# EAGLE board PCB schematic (EAGLE 9.6.2)
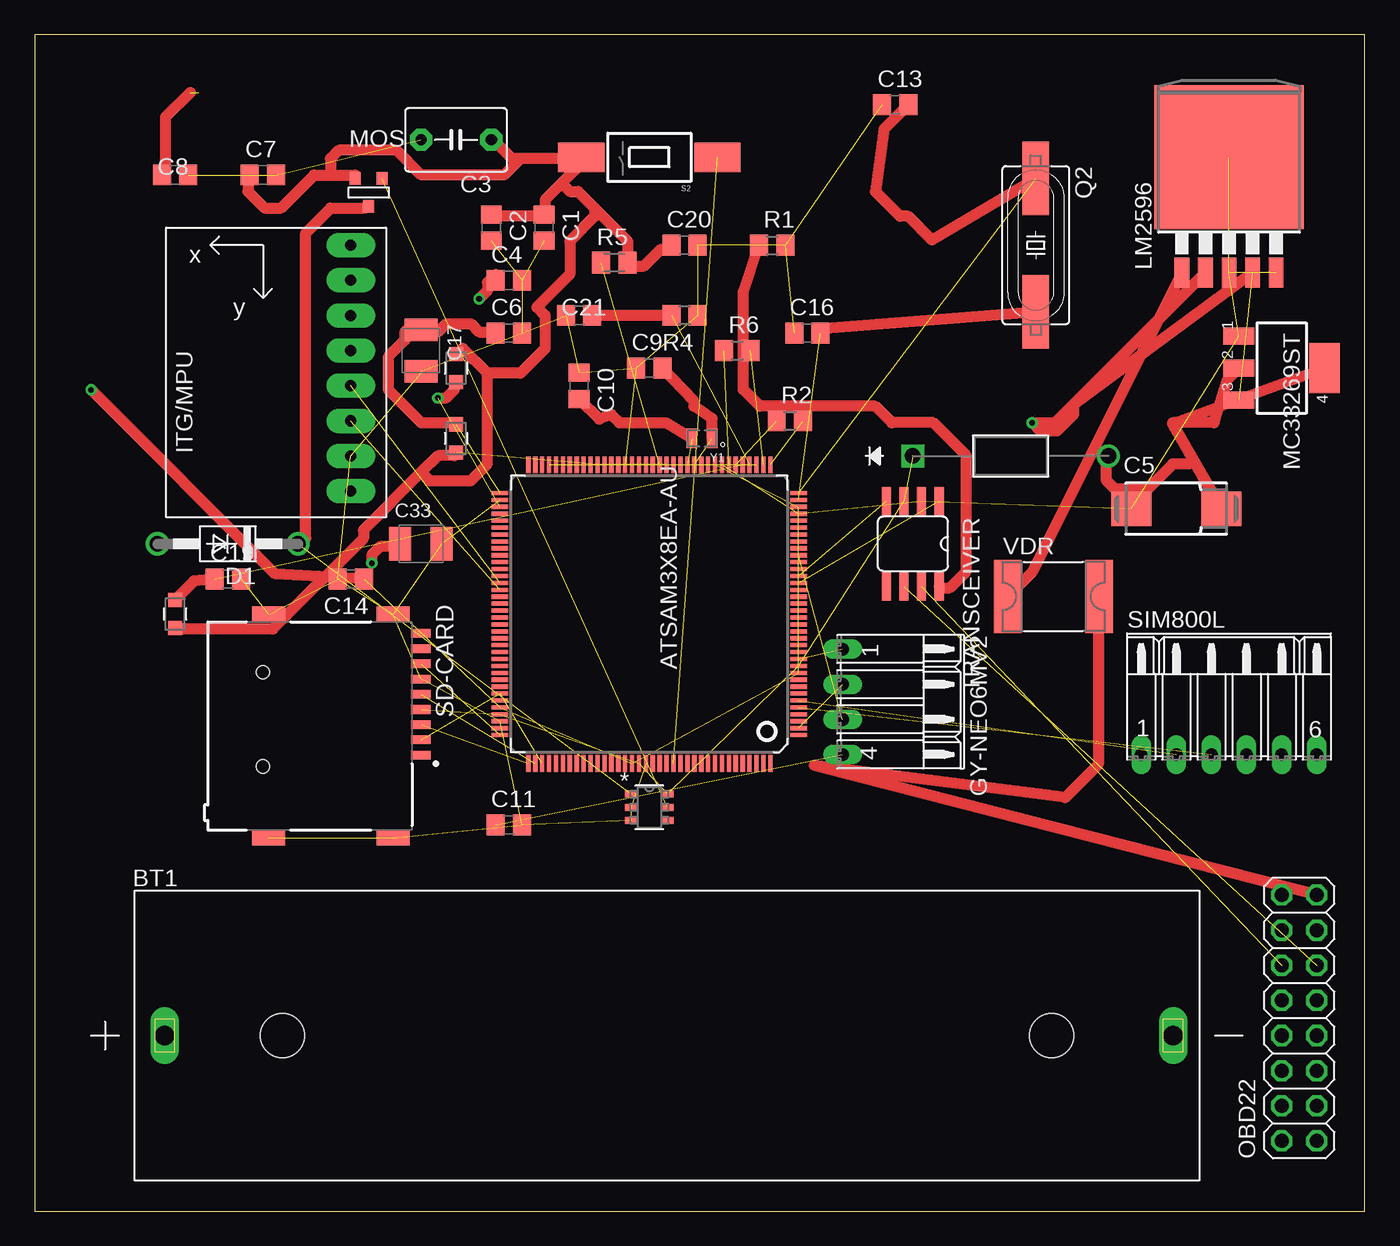
[diagram p0: board, top side]
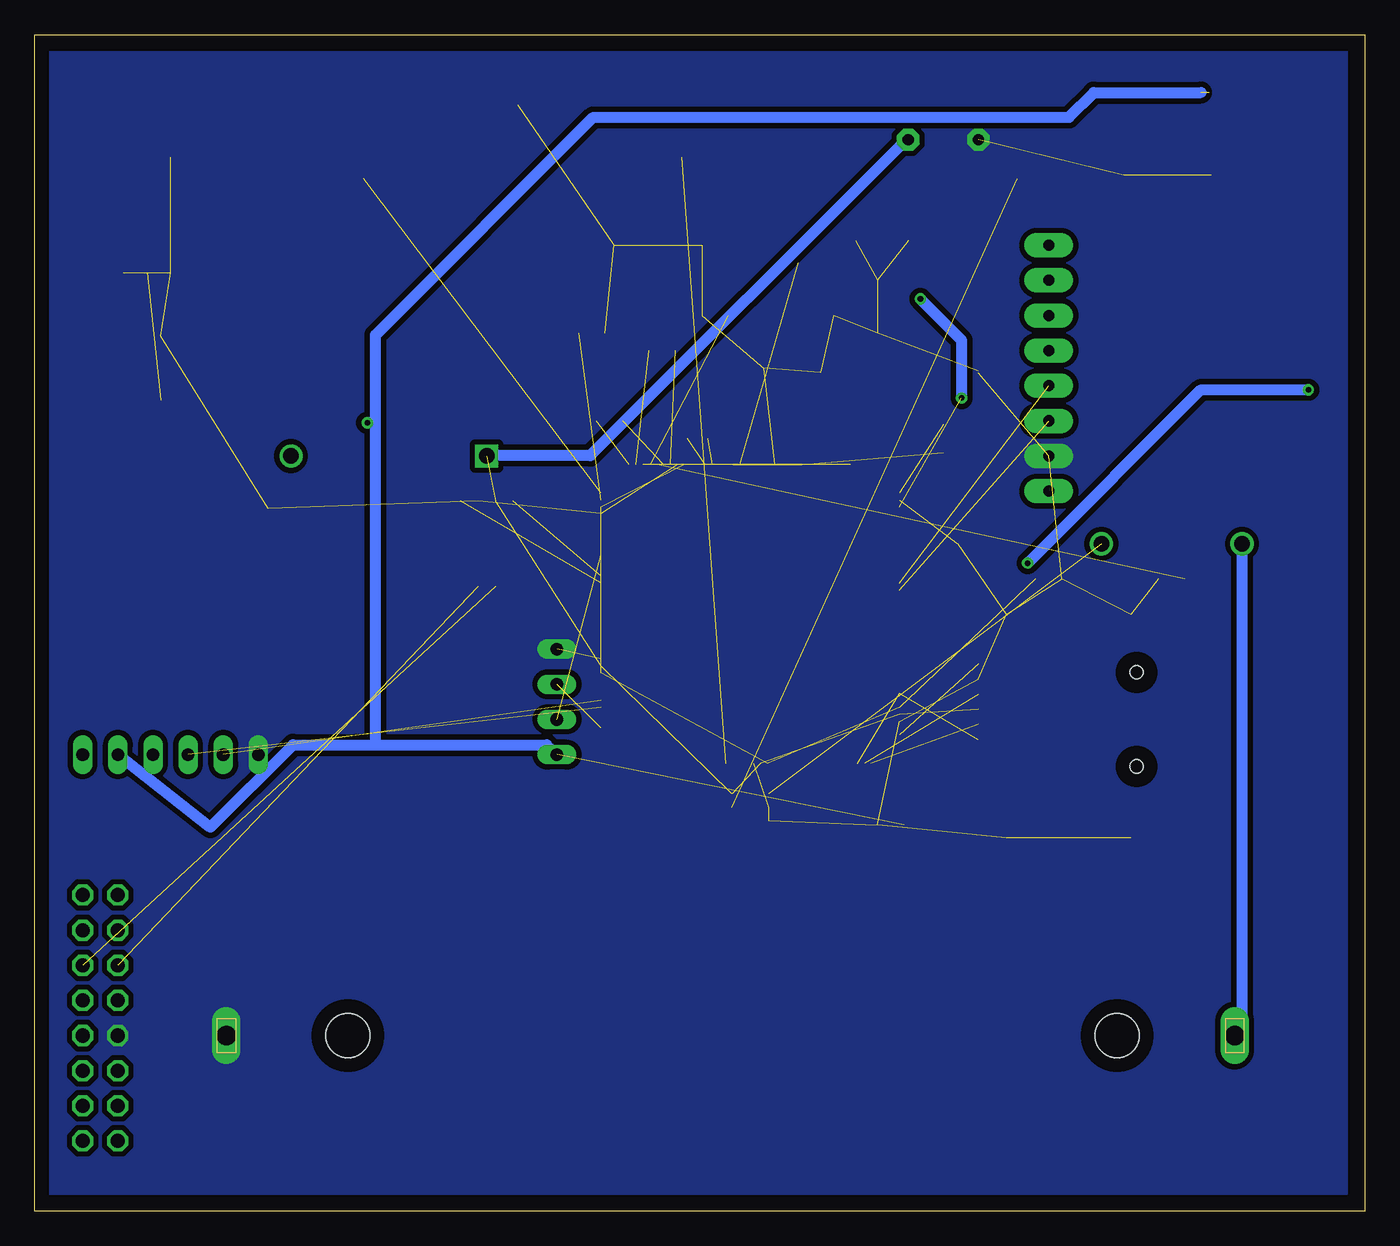
[diagram p1: board, bottom side, seen from below]

Size 96.19 x 85.08 mm. Coordinates in mm from the lower left corner, seen from the top.
Outline: 0,0 96.19,0 96.19,85.08 0,85.08 0,0
Copper layers (1*16): Top 0.035mm / dielectric 1.5mm / Bottom 0.035mm
Design rules "default *": minimum track width 32mil, minimum drill 0.35mm, track to track 15mil, track to pad 15mil, pad to pad 6mil, via to via 6mil, smd to smd 6mil, copper to edge 40mil, drill to drill 6mil, minimum pad ring 10mil, minimum via ring 8mil, stop-mask expansion 4mil, vias tented up to drill 0mil, thermal gap 0mil
Net classes: 0 default: width 0.203 mm, drill 0.406 mm, clearance 0.203 mm

## Footprints (pad centres in the part's own frame; a part is rotated, then mirrored left to right if it is on the bottom)
LQFP144 = smd 0.3 x 1.2: 1 -8.75,-10.8; 2 -8.25,-10.8; 3 -7.75,-10.8; 4 -7.25,-10.8; 5 -6.75,-10.8; 6 -6.25,-10.8; 7 -5.75,-10.8; 8 -5.25,-10.8; 9 -4.75,-10.8; 10 -4.25,-10.8; 11 -3.75,-10.8; 12 -3.25,-10.8; 13 -2.75,-10.8; 14 -2.25,-10.8; 15 -1.75,-10.8; 16 -1.25,-10.8; 17 -0.75,-10.8; 18 -0.25,-10.8; 19 0.25,-10.8; 20 0.75,-10.8; 21 1.25,-10.8; 22 1.75,-10.8; 23 2.25,-10.8; 24 2.75,-10.8; 25 3.25,-10.8; 26 3.75,-10.8; 27 4.25,-10.8; 28 4.75,-10.8; 29 5.25,-10.8; 30 5.75,-10.8; 31 6.25,-10.8; 32 6.75,-10.8; 33 7.25,-10.8; 34 7.75,-10.8; 35 8.25,-10.8; 36 8.75,-10.8; 73 8.75,10.8; 74 8.25,10.8; 75 7.75,10.8; 76 7.25,10.8; 77 6.75,10.8; 78 6.25,10.8; 79 5.75,10.8; 80 5.25,10.8; 81 4.75,10.8; 82 4.25,10.8; 83 3.75,10.8; 84 3.25,10.8; 85 2.75,10.8; 86 2.25,10.8; 87 1.75,10.8; 88 1.25,10.8; 89 0.75,10.8; 90 0.25,10.8; 91 -0.25,10.8; 92 -0.75,10.8; 93 -1.25,10.8; 94 -1.75,10.8; 95 -2.25,10.8; 96 -2.75,10.8; 97 -3.25,10.8; 98 -3.75,10.8; 99 -4.25,10.8; 100 -4.75,10.8; 101 -5.25,10.8; 102 -5.75,10.8; 103 -6.25,10.8; 104 -6.75,10.8; 105 -7.25,10.8; 106 -7.75,10.8; 107 -8.25,10.8; 108 -8.75,10.8 | smd 1.2 x 0.3: 37 10.8,-8.75; 38 10.8,-8.25; 39 10.8,-7.75; 40 10.8,-7.25; 41 10.8,-6.75; 42 10.8,-6.25; 43 10.8,-5.75; 44 10.8,-5.25; 45 10.8,-4.75; 46 10.8,-4.25; 47 10.8,-3.75; 48 10.8,-3.25; 49 10.8,-2.75; 50 10.8,-2.25; 51 10.8,-1.75; 52 10.8,-1.25; 53 10.8,-0.75; 54 10.8,-0.25; 55 10.8,0.25; 56 10.8,0.75; 57 10.8,1.25; 58 10.8,1.75; 59 10.8,2.25; 60 10.8,2.75; 61 10.8,3.25; 62 10.8,3.75; 63 10.8,4.25; 64 10.8,4.75; 65 10.8,5.25; 66 10.8,5.75; 67 10.8,6.25; 68 10.8,6.75; 69 10.8,7.25; 70 10.8,7.75; 71 10.8,8.25; 72 10.8,8.75; 109 -10.8,8.75; 110 -10.8,8.25; 111 -10.8,7.75; 112 -10.8,7.25; 113 -10.8,6.75; 114 -10.8,6.25; 115 -10.8,5.75; 116 -10.8,5.25; 117 -10.8,4.75; 118 -10.8,4.25; 119 -10.8,3.75; 120 -10.8,3.25; 121 -10.8,2.75; 122 -10.8,2.25; 123 -10.8,1.75; 124 -10.8,1.25; 125 -10.8,0.75; 126 -10.8,0.25; 127 -10.8,-0.25; 128 -10.8,-0.75; 129 -10.8,-1.25; 130 -10.8,-1.75; 131 -10.8,-2.25; 132 -10.8,-2.75; 133 -10.8,-3.25; 134 -10.8,-3.75; 135 -10.8,-4.25; 136 -10.8,-4.75; 137 -10.8,-5.25; 138 -10.8,-5.75; 139 -10.8,-6.25; 140 -10.8,-6.75; 141 -10.8,-7.25; 142 -10.8,-7.75; 143 -10.8,-8.25; 144 -10.8,-8.75
BAT_BK-18650-PC2 = drill 1.38 long: + -36.3,0; - 36.6,0 | hole 3.2: -27.805,0; 27.81,0
C0805 = smd 1.3 x 1.5: 1 -0.95,0; 2 0.95,0
C5B4.5 = drill 0.813 pad 1.6 octagon: 1 -2.54,0; 2 2.54,0
085CS_1AR = smd 2.9 x 2.5: + 3.25,0; - -3.25,0
SMC_B = smd 1.6 x 2.4: + -1.5,0; - 1.5,0
DO41-10 = drill 1.118: A 5.08,0; C -5.08,0
04PA = drill 0.914 long: 1 -3.81,0; 2 -1.27,0; 3 1.27,0; 4 3.81,0
IND_BOURNS_MH2029 = smd 1.016 x 1.016: 1 -1.016,0; 2 1.016,0
TO263-5 = smd 1.067 x 2.159: 1 -3.404,-5.791; 2 -1.702,-5.791; 3 0,-5.791; 4 1.702,-5.791; 5 3.404,-5.791 | smd 10.8 x 10.41: 6 0,2.54
SOT223 = smd 1.219 x 2.235: 1 -2.311,-3.099; 2 0,-3.099; 3 2.311,-3.099 | smd 3.6 x 2.2: 4 0,3.099
SOT-23 = smd 0.787 x 0.889: 1 0.025,-1.016; 2 -0.94,1.016; 3 0.991,1.016
GY-521 = drill 0.8 pad 1.778 long: ADO -8.89,-6.35; GND -8.89,6.35; INT -8.89,-8.89; SCL -8.89,3.81; SDA -8.89,1.27; VCC -8.89,8.89; XCL -8.89,-3.81; XDA -8.89,-1.27
2X08 = drill 1.016 octagon: 1 -8.89,1.27; 2 -6.35,1.27; 3 -3.81,1.27; 4 -1.27,1.27; 5 1.27,1.27; 6 3.81,1.27; 7 6.35,1.27; 8 8.89,1.27; 9 -8.89,-1.27; 10 -6.35,-1.27; 11 -3.81,-1.27; 12 -1.27,-1.27; 13 1.27,-1.27; 14 3.81,-1.27; 15 6.35,-1.27; 16 8.89,-1.27
HC49UP = smd 5.334 x 1.93: 1 -4.826,0; 2 4.826,0
R0805 = smd 1.3 x 1.5: 1 -0.95,0; 2 0.95,0
M0805 = smd 1.3 x 1.6: 1 -0.95,0; 2 0.95,0
TL3302_GULL_WING = smd 3.35 x 2.16: 1 -4.925,0; 2 4.925,0
GCT_MEM2075-00-140-01-A = smd 0.62 x 1.4: P1 2.58,11.42; P2 1.48,11.42; P3 0.38,11.42; P4 -0.72,11.42; P5 -1.82,11.42; P6 -2.92,11.42; P7 -4.02,11.42; P8 -5.12,11.42; P9 -6.22,11.42 | smd 1.1 x 2.4: SH1 -7.6,0.42; SH2 -7.6,9.42; SH3 8.55,9.42; SH4 8.55,0.42 | hole 0.95: -3.4,0; 3.4,0
06PA = drill 0.914 long: 1 -6.35,0; 2 -3.81,0; 3 -1.27,0; 4 1.27,0; 5 3.81,0; 6 6.35,0
TSOT-23_S6_LIT = smd 0.876 x 0.508: 1 -1.314,0.95; 2 -1.314,0; 3 -1.314,-0.95; 4 1.314,-0.95; 5 1.314,0; 6 1.314,0.95
SO8 = smd 0.66 x 2.032: 1 -1.905,-3.073; 2 -0.635,-3.073; 3 0.635,-3.073; 4 1.905,-3.073; 5 1.905,3.073; 6 0.635,3.073; 7 -0.635,3.073; 8 -1.905,3.073
2920L = smd 2 x 5.3: 1 -3.3,0; 2 3.3,0
DO-41_STM = drill 1.118 pad 1.626 square: 1 0,0 | drill 1.118 pad 1.626: 2 14.148,0
XTAL_ABS06-107-32.768KHZ-T = smd 0.75 x 1.4: 1 -0.73,0; 2 0.73,0

## Placement (x,y rotation side)
ATSAM3X8EA-AU  ATSAM3X8EA-AU  [LQFP144]  44.45,43.18 90 top
BT1  BK-18650-PC2  [BAT_BK-18650-PC2]  45.72,12.7 0 top
C1  100n  [C0805]  36.83,71.12 270 top
C2  100n  [C0805]  33.02,71.12 270 top
C3  0.1uF  [C5B4.5]  30.48,77.47 180 top
C4  100n  [C0805]  34.29,67.31 0 top
C5  10u  [085CS_1AR]  82.55,50.8 0 top
C6  100n  [C0805]  34.29,63.5 0 top
C7  100n  [C0805]  16.51,74.93 0 top
C8  100n  [C0805]  10.16,74.93 0 top
C9  22pF  [C0805]  44.45,60.96 0 top
C10  22pF  [C0805]  39.37,59.69 270 top
C11  100n  [C0805]  34.29,27.94 0 top
C13  22pF  [C0805]  62.23,80.01 0 top
C14  100n  [C0805]  22.86,45.72 180 top
C16  22pF  [C0805]  55.88,63.5 0 top
C17  10u  [SMC_B]  27.94,62.23 270 top
C19  100n  [C0805]  13.97,45.72 0 top
C20  100n  [C0805]  46.99,69.85 0 top
C21  22pF  [C0805]  39.37,64.77 0 top
C33  10u  [SMC_B]  27.94,48.26 0 top
D1  1N4004  [DO41-10]  13.97,48.26 180 top
GY-NEO6MV2  [04PA]  58.42,36.83 270 top
L1  MH2029-300Y  [IND_BOURNS_MH2029]  30.48,55.88 270 top
L2  MH2029-300Y  [IND_BOURNS_MH2029]  10.16,43.18 270 top
L3  MH2029-300Y  [IND_BOURNS_MH2029]  30.48,60.96 90 top
LM2596  [TO263-5]  86.36,73.66 0 top
MC33269ST  NCP1117ST33T3G -3V3  [SOT223]  90.17,60.96 270 top
MOS  [SOT-23]  24.13,73.66 0 top
MPU6050-MODULE  GY-521MPU6050  [GY-521]  13.97,60.96 180 top
OBD22  [2X08]  91.44,13.97 90 top
Q2  12Mhz  [HC49UP]  72.39,69.85 270 top
R1  10k  [R0805]  53.34,69.85 0 top
R2  39R 1%  [R0805]  54.61,57.15 0 top
R4  6k8 1%  [R0805]  46.99,64.77 180 top
R5  100k  [M0805]  41.91,68.58 0 top
R6  39R 1%  [R0805]  50.8,62.23 0 top
S2  [TL3302_GULL_WING]  44.45,76.2 180 top
SD-CARD  MEM2075-00-140-01-A  [GCT_MEM2075-00-140-01-A]  16.51,35.56 270 top
SIM800L  [06PA]  86.36,33.02 0 top
SWITCH  LTC4412IS6TRMPBF  [TSOT-23_S6_LIT]  44.45,29.21 0 top
TRANSCEIVER  SN65HVD230/1  [SO8]  63.5,48.26 180 top
VDR  2920L300  [2920L]  73.66,44.45 0 top
VIN  1N5819  [DO-41_STM]  63.5,54.61 0 top
Y1  ABS06-107-32.768KHZ-T  [XTAL_ABS06-107-32.768KHZ-T]  48.26,55.88 180 top

## Library data of the parts
ATSAM3X8EA-AU = SmartPrj
BT1 = BK-18650-PC2; AVAILABILITY: In Stock; DESCRIPTION: Battery Holder (Open) 18650 1 Cell PC Pin; MF: MPD (Memory Protection Devices); MP: BK-18650-PC2; PACKAGE: None; PRICE: None; PURCHASE-URL: https://pricing.snapeda.com/search?q=BK-18650-PC2&ref=eda
C1 C2 C4 C6-C11 C13 C14 C16 C19-C21 = eagle-ltspice; SPICEMODEL: NONE; SPICEPREFIX: C
C3 = capacitor-wima
C5 C17 C33 R1 R5 = rcl
D1 = diode
GY-NEO6MV2 SIM800L = con-amp-quick; OC_FARNELL: unknown; OC_NEWARK: unknown
L1-L3 = MH2029; COPYRIGHT: Copyright (C) 2023 Ultra Librarian. All rights reserved.; MANUFACTURER_PART_NUMBER: MH2029-300Y; MFR_NAME: Bourns Electronics
LM2596 MC33269ST = linear
MOS = zetex; OC_FARNELL: unknown; OC_NEWARK: unknown
MPU6050-MODULE = gy-521
OBD22 = pinhead
Q2 = crystal; OC_FARNELL: unknown; OC_NEWARK: unknown
R2 R4 R6 = eagle-ltspice; SPICEMODEL: NONE; SPICEPREFIX: R
S2 = eswitch-tact
SD-CARD = MEM2075-00-140-01-A; AVAILABILITY: Unavailable; MF: Global Connector Technology; MP: MEM2075-00-140-01-A; PACKAGE: Package Analog Devices; PRICE: None
SWITCH = switcheur; COPYRIGHT: Copyright (C) 2023 Ultra Librarian. All rights reserved.; MANUFACTURER_PART_NUMBER: LTC4412IS6#TRMPBF; MFR_NAME: Analog Devices Inc
TRANSCEIVER = texas-instruments
VDR = polyfuse-smd_10; MF: Littelfuse; MPN: 2920L300; OC_FARNELL: unknown; OC_NEWARK: unknown
VIN = diode_1N5819; COPYRIGHT: Copyright (C) 2023 Ultra Librarian. All rights reserved.; MANUFACTURER_PART_NUMBER: 1N5819; MFR_NAME: STMicroelectronics
Y1 = ABS06-107-32.768KHZ-T; AVAILABILITY: In Stock; DESCRIPTION: 32.768 kHz ±20ppm Crystal 4pF 60 kOhms 2-SMD, No Lead; MF: Abracon LLC; MP: ABS06-107-32.768KHZ-T; PACKAGE: None; PRICE: None; PURCHASE-URL: https://pricing.snapeda.com/search?q=ABS06-107-32.768KHZ-T&ref=eda

## Nets
+3,3VINN: C5.+ MC33269ST.2 MC33269ST.4 VIN.2
+3,3VV: ATSAM3X8EA-AU.11 ATSAM3X8EA-AU.52 ATSAM3X8EA-AU.57 ATSAM3X8EA-AU.62 ATSAM3X8EA-AU.105 ATSAM3X8EA-AU.125 C1.1 C2.1 C3.1 C7.1 C20.1 L1.2 L2.2 L3.2 MOS.2 R5.2 S2.2 SD-CARD.P4 SWITCH.6 TRANSCEIVER.3 VIN.1
+5V: C8.1 C11.1 GY-NEO6MV2.4 LM2596.2 LM2596.4 MC33269ST.3 SIM800L.5
AD1: ATSAM3X8EA-AU.79
AD2: ATSAM3X8EA-AU.80
AD3: ATSAM3X8EA-AU.81
AD4: ATSAM3X8EA-AU.82
AD11(TXD3): ATSAM3X8EA-AU.91
AD14(RXD3): ATSAM3X8EA-AU.92
ADVREF: ATSAM3X8EA-AU.75 C4.1 L3.1
CANRX0: ATSAM3X8EA-AU.24 TRANSCEIVER.4
CANTX0: ATSAM3X8EA-AU.23 TRANSCEIVER.1
CANTX1/IO: ATSAM3X8EA-AU.140
DAC0(CANRX1): ATSAM3X8EA-AU.76
EEXTINT: ATSAM3X8EA-AU.25
GND: ATSAM3X8EA-AU.12 ATSAM3X8EA-AU.33 ATSAM3X8EA-AU.44 ATSAM3X8EA-AU.46 ATSAM3X8EA-AU.54 ATSAM3X8EA-AU.58 ATSAM3X8EA-AU.74 ATSAM3X8EA-AU.106 ATSAM3X8EA-AU.126 BT1.- C1.2 C2.2 C3.2 C4.2 C5.- C6.2 C7.2 C8.2 C9.1 C10.1 C11.2 C13.1 C14.2 C16.1 C17.- C19.2 C20.2 C21.1 C33.- GY-NEO6MV2.1 LM2596.3 LM2596.5 LM2596.6 MC33269ST.1 MPU6050-MODULE.GND OBD22.4 R1.2 R4.1 SD-CARD.P6 SD-CARD.SH1 SD-CARD.SH2 SD-CARD.SH3 SD-CARD.SH4 SIM800L.1 SWITCH.2 SWITCH.3 TRANSCEIVER.2
MISO: ATSAM3X8EA-AU.108 SD-CARD.P7
MOSI: ATSAM3X8EA-AU.109 SD-CARD.P3
N$1: OBD22.6 TRANSCEIVER.7
N$2: R1.1 TRANSCEIVER.8
N$3: ATSAM3X8EA-AU.48 C9.2 Y1.1
N$4: ATSAM3X8EA-AU.36 C13.2 Q2.1
N$5: OBD22.14 TRANSCEIVER.6
N$6: ATSAM3X8EA-AU.49 C10.2 Y1.2
N$7: ATSAM3X8EA-AU.53 R5.1
N$8: MPU6050-MODULE.VCC
N$9: ATSAM3X8EA-AU.43 R6.1
N$10: ATSAM3X8EA-AU.38 R6.2
N$11: ATSAM3X8EA-AU.42 R2.1
N$12: ATSAM3X8EA-AU.37 R2.2
N$13: ATSAM3X8EA-AU.40 C21.2 R4.2
N$14: ATSAM3X8EA-AU.47 ATSAM3X8EA-AU.69
N$18: ATSAM3X8EA-AU.130 S2.1
N$19: LM2596.1 VDR.1
N$47: MOS.3 SWITCH.5
PIN31: ATSAM3X8EA-AU.26
RXD0: ATSAM3X8EA-AU.18
RXD1: ATSAM3X8EA-AU.5 SIM800L.3
RXD2: ATSAM3X8EA-AU.3
RXG: ATSAM3X8EA-AU.27 GY-NEO6MV2.3
RXL: ATSAM3X8EA-AU.103
SCL0-3: ATSAM3X8EA-AU.87 MPU6050-MODULE.SCL
SCL1: ATSAM3X8EA-AU.70
SDA0-3: ATSAM3X8EA-AU.86 MPU6050-MODULE.SDA
SDA1: ATSAM3X8EA-AU.9
SPCK: ATSAM3X8EA-AU.110 SD-CARD.P5
SS0/PWM10: ATSAM3X8EA-AU.102 ATSAM3X8EA-AU.111 SD-CARD.P2
SS1/PWM4: ATSAM3X8EA-AU.137
TXD0: ATSAM3X8EA-AU.17
TXD1: ATSAM3X8EA-AU.6 SIM800L.2
TXD2: ATSAM3X8EA-AU.4
TXG: ATSAM3X8EA-AU.2 GY-NEO6MV2.2
TXL: ATSAM3X8EA-AU.107
UOTGID: ATSAM3X8EA-AU.129
VBATTC: OBD22.16 VDR.2
VBUS: ATSAM3X8EA-AU.39 ATSAM3X8EA-AU.51
VDDANA: ATSAM3X8EA-AU.73 C6.1 C17.+ L1.1
VDDOUT: ATSAM3X8EA-AU.10 ATSAM3X8EA-AU.34 ATSAM3X8EA-AU.45 ATSAM3X8EA-AU.56 ATSAM3X8EA-AU.61 ATSAM3X8EA-AU.104 ATSAM3X8EA-AU.124 C14.1 C33.+
VDDOUTMI: ATSAM3X8EA-AU.41 C19.1 L2.1
VINBAA: BT1.+ D1.A
VINBASS: D1.C MOS.1 SWITCH.1
XOUT: ATSAM3X8EA-AU.35 C16.2 Q2.2

## Tracks (layer width: path | path; a pad name or v marks a point on that pad's centre or on a via)
+3,3VINN
  Top 0.813: 82.49,57.01 85.27,57.01 86.25,60.14 MC33269ST.2 | 82.49,57.01 82.28,57.01 82.28,56.89 83.82,54.23 | 82.49,57.01 MC33269ST.4 | 83.82,54.23 C5.+ | VIN.2 77.51,54.03 77.51,52.83 78.1,52.23 80.49,52.23 82.28,54.03 83.48,54.03 83.82,54.23
+3,3VV  (9 unrouted)
  Top 0.813: 27.97,53.43 29.16,54.62 30.35,54.62 L1.2 | 27.97,53.43 23.79,49.25 23.79,48.65 17.22,42.09 10.66,42.09 L2.2 | 32.74,60.59 30.95,62.38 L3.2 | 32.74,60.59 32.74,54.03 31.55,52.83 28.56,52.83 27.97,53.43 | 21.4,74.92 20.21,74.92 17.82,72.53 16.62,72.53 15.43,73.72 15.43,74.92 C7.1 | 21.4,74.92 23.19,74.92 MOS.2 | C20.1 45.87,69.55 45.28,69.55 44.08,68.35 42.89,68.35 R5.2 42.89,68.95 42.89,70.14 40.5,72.53 | C2.1 33.34,71.93 36.32,71.93 C1.1 36.92,72.53 36.92,73.13 38.11,74.32 | 38.11,74.32 39.9,76.11 S2.2 39.31,76.11 35.13,76.11 | 40.5,72.53 39.31,73.72 38.71,73.72 38.11,74.32 | 35.13,76.11 34.53,76.11 33.34,77.3 C3.1 | 21.4,74.92 21.4,76.11 22,76.71 26.17,76.71 27.97,74.92 33.93,74.92 35.13,76.11 | 32.74,60.59 35.13,60.59 36.92,62.38 36.92,64.77 36.32,65.37 38.71,67.75 38.71,70.14 40.5,71.93 40.5,72.53
  Bottom 0.813: VIN.1 63.18,54.62 56.02,54.62 33.34,77.3 C3.1
+5V  (via drill 0.41)  (3 unrouted)
  Top 0.813: 11.25,80.89 9.46,79.1 9.46,75.51 C8.1 | LM2596.2 73.8,57.01 v72.14,57.01 72.73,56.41 73.93,56.41 75.12,57.61 75.12,58.33 LM2596.4
  Bottom 0.813: 71.54,33.73 77.51,33.73 83.49,27.75 SIM800L.5 | 71.54,33.73 59.16,33.73 GY-NEO6MV2.4 | 71.54,57.01 v72.14,57.01 | 71.54,33.73 71.54,57.01 | 71.54,57.01 71.54,63.36 55.8,79.1 21.4,79.1 19.61,80.89 11.85,80.89
ADVREF  (via drill 0.41)  (1 unrouted)
  Top 0.813: v29.16,58.8 29.76,58.8 30.35,59.4 30.35,59.99 L3.1 | v32.14,65.96 32.74,66.56 32.74,67.16 33.34,67.75 C4.1
  Bottom 0.813: v29.16,58.8 29.16,62.98 v32.14,65.96
CANRX0  (1 unrouted)
CANTX0  (1 unrouted)
GND  (41 unrouted)
  Top 0.813: 27.97,60.59 C17.-
  pour Bottom: 1.27,83.82 95.25,83.82 95.25,55.88 95.25,1.27 92.71,1.27 1.27,1.27 1.27,2.54
MISO  (1 unrouted)
MOSI  (1 unrouted)
N$1  (1 unrouted)
N$2
  Top 0.813: R1.1 51.24,66.46 51.24,59.4 52.44,58.2 60.79,58.2 61.99,57.01 64.97,57.01 67.36,54.62 67.36,46.27 66.17,45.07 65.57,45.07 TRANSCEIVER.8
N$3  (1 unrouted)
  Top 0.813: Y1.1 48.99,57.3 47.66,58.2 47.66,58.57 C9.2
N$4  (1 unrouted)
  Top 0.813: C13.2 61.42,78.25 60.79,73.72 62.59,71.93 63.18,71.93 64.9,70.22 Q2.1
N$5  (1 unrouted)
N$6  (1 unrouted)
  Top 0.813: Y1.2 45.63,57.01 42.29,57.01 41.69,57.61 40.84,57.27 C10.2
N$7  (1 unrouted)
N$9  (1 unrouted)
N$10  (1 unrouted)
N$11  (1 unrouted)
N$12  (1 unrouted)
N$13  (1 unrouted)
  Top 0.813: R4.2 C21.2
N$14  (1 unrouted)
N$18  (1 unrouted)
N$19
  Top 0.813: LM2596.1 72.13,46.22 VDR.1
N$47  (1 unrouted)
RXD1  (1 unrouted)
RXG  (1 unrouted)
SCL0-3  (1 unrouted)
SDA0-3  (1 unrouted)
SPCK  (1 unrouted)
SS0/PWM10  (2 unrouted)
TXD1  (1 unrouted)
TXG  (1 unrouted)
VBATTC
  Top 0.813: OBD22.16 56.37,32.24 74.52,29.91 76.91,32.31 76.91,44.18 VDR.2
VBUS  (1 unrouted)
VDDANA  (1 unrouted)
  Top 0.813: L1.1 30.35,57.01 27.97,57.01 25.58,59.4 25.58,61.79 26.77,62.98 26.77,63.58 27.37,64.17 C17.+ 27.97,63.58 29.16,63.58 29.76,64.17 31.55,64.17 32.14,63.58 33.34,63.58 C6.1
VDDOUT  (via drill 0.41)  (7 unrouted)
  Top 0.813: v24.38,46.86 24.38,47.46 24.98,48.06 26.17,48.06 C33.+ | C14.1 17.41,46.08 v4.09,59.4
  Bottom 0.813: v4.09,59.4 11.85,59.4 v24.38,46.86
VDDOUTMI  (1 unrouted)
  Top 0.813: C19.1 11.54,45.57 L2.1
VINBAA
  Bottom 0.813: D1.A 8.87,48.06 8.87,13.28 BT1.+
VINBASS  (1 unrouted)
  Top 0.813: MOS.1 23.79,72.53 21.4,72.53 19.61,70.74 19.61,48.65 D1.C
XOUT  (1 unrouted)
  Top 0.813: Q2.2 57.13,63.8 C16.2